# EAGLE board supervisor (EAGLE 5.11)
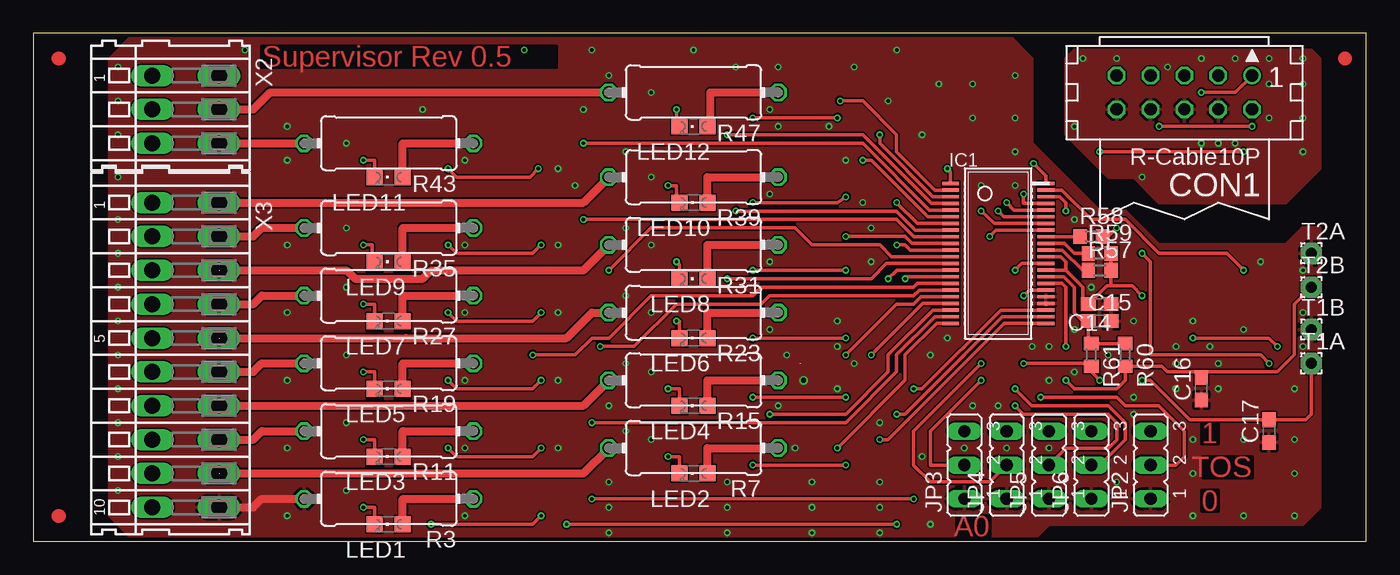
[diagram p0: board, top side]
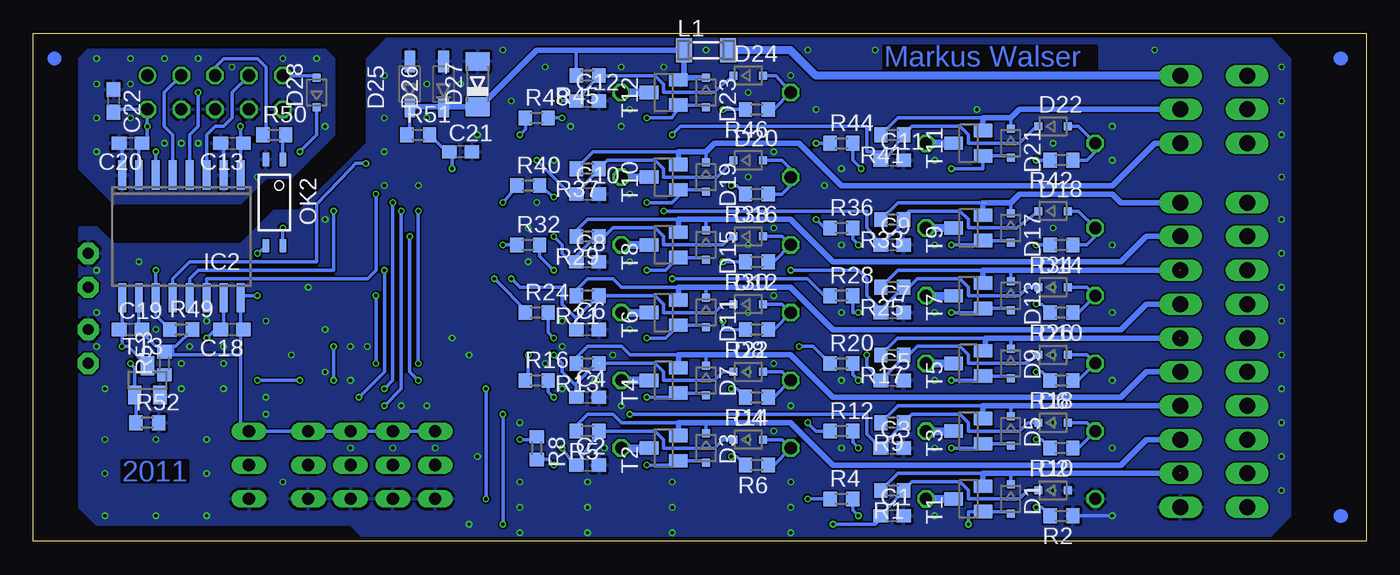
[diagram p1: board, bottom side, seen from below]

Size 100 x 38.09 mm. Coordinates in mm from the lower left corner, seen from the top.
Outline: 0,0 100,0 100,38.09 0,38.09 0,0
Copper layers (1*16): Top 0.035mm / dielectric 1.5mm / Bottom 0.035mm
Design rules "PCB-POOL HighSpec *": minimum track width 0.125mm, minimum drill 0.2mm, track to track 0.125mm, track to pad 0.125mm, pad to pad 0.125mm, via to via 0.125mm, smd to smd 0.125mm, copper to edge 0.3mm, drill to drill 0.2mm, minimum pad ring 0.2mm, minimum via ring 0.125mm, stop-mask expansion 0.075mm, vias tented up to drill 10mil, thermal gap 0.2mm

## Footprints (pad centres in the part's own frame; a part is rotated, then mirrored left to right if it is on the bottom)
C0603 = smd 1.1 x 1: 1 -0.85,0; 2 0.85,0
CON10 = drill 0.914 round: 1 -5.08,-1.27 | drill 0.914 octagon: 2 -5.08,1.27; 3 -2.54,-1.27; 4 -2.54,1.27; 5 0,-1.27; 6 0,1.27; 7 2.54,-1.27; 8 2.54,1.27; 9 5.08,-1.27; 10 5.08,1.27
SOD323-R = smd 0.6 x 0.6: A 1.1,0; C -1.1,0
SOD123 = smd 1.6 x 0.8: 1 -1.7,0; 2 1.7,0
MINIMELF = smd 1.4 x 1.8: A 1.7,0; C -1.7,0
SSOP44DL = smd 0.25 x 1.25: 1 -5.25,-3.575; 2 -4.75,-3.575; 3 -4.25,-3.575; 4 -3.75,-3.575; 5 -3.25,-3.575; 6 -2.75,-3.575; 7 -2.25,-3.575; 8 -1.75,-3.575; 9 -1.25,-3.575; 10 -0.75,-3.575; 11 -0.25,-3.575; 12 0.25,-3.575; 13 0.75,-3.575; 14 1.25,-3.575; 15 1.75,-3.575; 16 2.25,-3.575; 17 2.75,-3.575; 18 3.25,-3.575; 19 3.75,-3.575; 20 4.25,-3.575; 21 4.75,-3.575; 22 5.25,-3.575; 23 5.25,3.575; 24 4.75,3.575; 25 4.25,3.575; 26 3.75,3.575; 27 3.25,3.575; 28 2.75,3.575; 29 2.25,3.575; 30 1.75,3.575; 31 1.25,3.575; 32 0.75,3.575; 33 0.25,3.575; 34 -0.25,3.575; 35 -0.75,3.575; 36 -1.25,3.575; 37 -1.75,3.575; 38 -2.25,3.575; 39 -2.75,3.575; 40 -3.25,3.575; 41 -3.75,3.575; 42 -4.25,3.575; 43 -4.75,3.575; 44 -5.25,3.575
SO16W = smd 0.6 x 2.2: 1 -4.445,-4.6; 2 -3.175,-4.6; 3 -1.905,-4.6; 4 -0.635,-4.6; 5 0.635,-4.6; 6 1.905,-4.6; 7 3.175,-4.6; 8 4.445,-4.6; 9 4.445,4.6; 10 3.175,4.6; 11 1.905,4.6; 12 0.635,4.6; 13 -0.635,4.6; 14 -1.905,4.6; 15 -3.175,4.6; 16 -4.445,4.6
JP2 = drill 0.914 long: 1 -2.54,0; 2 0,0; 3 2.54,0
SM-1206 = smd 1.2 x 1.8: 1 -1.65,0; 2 1.65,0
CHIPLED_0805 = smd 1.2 x 1.2: A 0,-1.05; C 0,1.05
MINI-FLAT-4 = smd 1 x 0.5: 1 -3.24,0.635; 2 -3.24,-0.635; 3 3.24,-0.635; 4 3.24,0.635
R0603 = smd 1 x 1.1: 1 -0.85,0; 2 0.85,0
0411/12 = drill 0.914 octagon: 1 -6.35,0; 2 6.35,0
SOT23 = smd 1 x 1.4: 1 -0.95,-1.1; 2 0.95,-1.1; 3 0,1.1
1,6/0,8 = drill 0.813 pad 1.6 octagon: 1 0,0
233-503 = drill 1.2 long: A1 -2.54,2.5; A2 0,2.5; A3 2.54,2.5; B1 -2.54,-2.5; B2 0,-2.5; B3 2.54,-2.5
233-510 = drill 1.2 long: A1 -11.43,2.5; A2 -8.89,2.5; A3 -6.35,2.5; A4 -3.81,2.5; A5 -1.27,2.5; A6 1.27,2.5; A7 3.81,2.5; A8 6.35,2.5; A9 8.89,2.5; A10 11.43,2.5; B1 -11.43,-2.5; B2 -8.89,-2.5; B3 -6.35,-2.5; B4 -3.81,-2.5; B5 -1.27,-2.5; B6 1.27,-2.5; B7 3.81,-2.5; B8 6.35,-2.5; B9 8.89,-2.5; B10 11.43,-2.5

## Placement (x,y rotation side)
C1  100n  [C0603]  35.56,1.91 0 bottom
C2  100n  [C0603]  58.42,5.71 0 bottom
C3  100n  [C0603]  35.56,6.99 0 bottom
C4  100n  [C0603]  58.42,10.79 0 bottom
C5  100n  [C0603]  35.56,12.06 0 bottom
C6  100n  [C0603]  58.42,15.88 0 bottom
C7  100n  [C0603]  35.56,17.14 0 bottom
C8  100n  [C0603]  58.42,20.95 0 bottom
C9  100n  [C0603]  35.56,22.23 0 bottom
C10  100n  [C0603]  58.42,26.04 0 bottom
C11  100n  [C0603]  35.56,28.57 0 bottom
C12  100n  [C0603]  58.42,33.02 0 bottom
C13  100n  [C0603]  85.09,29.84 180 bottom
C14  1u  [C0603]  80.01,17.78 180 top
C15  1u  [C0603]  80.01,16.51 0 top
C16  1u  [C0603]  87.63,11.43 90 top
C17  1u  [C0603]  92.71,8.26 90 top
C18  100n  [C0603]  85.09,15.88 180 bottom
C19  100n  [C0603]  92.71,15.88 0 bottom
C20  100n  [C0603]  92.71,29.84 180 bottom
C21  100n  [C0603]  67.94,29.21 0 bottom
C22  1u  [C0603]  93.98,33.02 270 bottom
CON1  SPI  [CON10]  86.36,33.66 180 top
D1  MM3Z12VT1G  [SOD323-R]  26.67,3.17 270 bottom
D2  PDZ6.2B  [SOD323-R]  23.5,3.81 0 bottom
D3  MM3Z12VT1G  [SOD323-R]  49.53,6.99 270 bottom
D4  PDZ6.2B  [SOD323-R]  46.35,7.62 0 bottom
D5  MM3Z12VT1G  [SOD323-R]  26.67,8.26 270 bottom
D6  PDZ6.2B  [SOD323-R]  23.5,8.89 0 bottom
D7  MM3Z12VT1G  [SOD323-R]  49.53,12.06 270 bottom
D8  PDZ6.2B  [SOD323-R]  46.35,12.7 0 bottom
D9  MM3Z12VT1G  [SOD323-R]  26.67,13.34 270 bottom
D10  PDZ6.2B  [SOD323-R]  23.5,13.97 0 bottom
D11  MM3Z12VT1G  [SOD323-R]  49.53,17.14 270 bottom
D12  PDZ6.2B  [SOD323-R]  46.35,17.78 0 bottom
D13  MM3Z12VT1G  [SOD323-R]  26.67,18.41 270 bottom
D14  PDZ6.2B  [SOD323-R]  23.5,19.05 0 bottom
D15  MM3Z12VT1G  [SOD323-R]  49.53,22.23 270 bottom
D16  PDZ6.2B  [SOD323-R]  46.35,22.86 0 bottom
D17  MM3Z12VT1G  [SOD323-R]  26.67,23.5 270 bottom
D18  PDZ6.2B  [SOD323-R]  23.5,24.77 0 bottom
D19  MM3Z12VT1G  [SOD323-R]  49.53,27.3 270 bottom
D20  PDZ6.2B  [SOD323-R]  46.35,28.57 0 bottom
D21  MM3Z12VT1G  [SOD323-R]  26.67,29.84 270 bottom
D22  PDZ6.2B  [SOD323-R]  23.5,31.11 0 bottom
D23  MM3Z12VT1G  [SOD323-R]  49.53,33.66 270 bottom
D24  PDZ6.2B  [SOD323-R]  46.35,34.92 0 bottom
D25  BAT46W  [SOD123]  71.75,34.29 90 bottom
D26  BAT46W  [SOD123]  69.22,34.29 90 bottom
D27  BZV55-C62  [MINIMELF]  66.67,34.29 90 bottom
D28  CMDSH2-3  [SOD323-R]  78.74,33.66 90 bottom
IC1  LTC6802-2  [SSOP44DL]  72.39,21.59 270 top
IC2  ADuM1401  [SO16W]  88.9,22.86 180 bottom
JP2  TOS  [JP2]  83.82,5.71 90 top
JP3  A0  [JP2]  69.85,5.71 90 top
JP4  A1  [JP2]  73.03,5.71 90 top
JP5  A2  [JP2]  76.2,5.71 90 top
JP6  A3  [JP2]  79.38,5.71 90 top
L1  BLM31PG121SN1L  [SM-1206]  49.53,36.83 0 bottom
LED1  RED  [CHIPLED_0805]  26.67,1.27 90 top
LED2  RED  [CHIPLED_0805]  49.53,5.08 90 top
LED3  RED  [CHIPLED_0805]  26.67,6.35 90 top
LED4  RED  [CHIPLED_0805]  49.53,10.16 90 top
LED5  RED  [CHIPLED_0805]  26.67,11.43 90 top
LED6  RED  [CHIPLED_0805]  49.53,15.24 90 top
LED7  RED  [CHIPLED_0805]  26.67,16.51 90 top
LED8  RED  [CHIPLED_0805]  49.53,19.68 90 top
LED9  RED  [CHIPLED_0805]  26.67,20.95 90 top
LED10  RED  [CHIPLED_0805]  49.53,25.4 90 top
LED11  RED  [CHIPLED_0805]  26.67,27.3 90 top
LED12  RED  [CHIPLED_0805]  49.53,31.11 90 top
OK2  TLP281  [MINI-FLAT-4]  81.92,25.4 270 bottom
R1  100  [R0603]  35.56,3.81 180 bottom
R2  470  [R0603]  22.86,1.91 180 bottom
R3  15  [0411/12]  26.67,3.17 180 top
R4  3k3  [R0603]  39.37,3.17 0 bottom
R5  100  [R0603]  58.42,8.26 180 bottom
R6  470  [R0603]  45.72,5.71 180 bottom
R7  15  [0411/12]  49.53,6.99 180 top
R8  3k3  [R0603]  62.23,6.99 270 bottom
R9  100  [R0603]  35.56,8.89 180 bottom
R10  470  [R0603]  22.86,6.99 180 bottom
R11  15  [0411/12]  26.67,8.26 180 top
R12  3k3  [R0603]  39.37,8.26 0 bottom
R13  100  [R0603]  58.42,13.34 180 bottom
R14  470  [R0603]  45.72,10.79 180 bottom
R15  15  [0411/12]  49.53,12.06 180 top
R16  3k3  [R0603]  62.23,12.06 0 bottom
R17  100  [R0603]  35.56,13.97 180 bottom
R18  470  [R0603]  22.86,12.06 180 bottom
R19  15  [0411/12]  26.67,13.34 180 top
R20  3k3  [R0603]  39.37,13.34 0 bottom
R21  100  [R0603]  58.42,18.41 180 bottom
R22  470  [R0603]  45.72,15.88 180 bottom
R23  15  [0411/12]  49.53,17.14 180 top
R24  3k3  [R0603]  62.23,17.14 0 bottom
R25  100  [R0603]  35.56,19.05 180 bottom
R26  470  [R0603]  22.86,17.14 180 bottom
R27  15  [0411/12]  26.67,18.41 180 top
R28  3k3  [R0603]  39.37,18.41 0 bottom
R29  100  [R0603]  58.42,22.86 180 bottom
R30  470  [R0603]  45.72,20.95 180 bottom
R31  15  [0411/12]  49.53,22.23 180 top
R32  3k3  [R0603]  62.87,22.23 0 bottom
R33  100  [R0603]  35.56,24.13 180 bottom
R34  470  [R0603]  22.86,22.23 180 bottom
R35  15  [0411/12]  26.67,23.5 180 top
R36  3k3  [R0603]  39.37,23.5 0 bottom
R37  100  [R0603]  58.42,27.94 180 bottom
R38  470  [R0603]  45.72,26.04 180 bottom
R39  15  [0411/12]  49.53,27.3 180 top
R40  3k3  [R0603]  62.87,26.67 0 bottom
R41  100  [R0603]  35.56,30.48 180 bottom
R42  470  [R0603]  22.86,28.57 180 bottom
R43  15  [0411/12]  26.67,29.84 180 top
R44  3k3  [R0603]  39.37,29.84 0 bottom
R45  100  [R0603]  58.42,34.92 180 bottom
R46  470  [R0603]  45.72,32.38 180 bottom
R47  15  [0411/12]  49.53,33.66 180 top
R48  3k3  [R0603]  62.23,31.75 0 bottom
R49  3k9  [R0603]  88.9,15.88 0 bottom
R50  3k9  [R0603]  81.92,30.48 0 bottom
R51  20  [R0603]  71.12,30.48 0 bottom
R52  100k  [R0603]  91.44,8.89 0 bottom
R53  100k  [R0603]  90.17,13.34 90 bottom
R57  1M  [R0603]  80.01,20.32 0 top
R58  1M  [R0603]  79.38,22.86 0 top
R59  1M  [R0603]  80.01,21.59 0 top
R60  100k  [R0603]  81.92,13.97 270 top
R61  100k  [R0603]  79.38,13.97 270 top
T1  BSS308PE  [SOT23]  29.84,3.17 90 bottom
T1A  WIREPAD1,6/0,8  [1,6/0,8]  95.89,13.34 0 top
T1B  WIREPAD1,6/0,8  [1,6/0,8]  95.89,15.88 0 top
T2  BSS308PE  [SOT23]  52.7,6.99 90 bottom
T2A  WIREPAD1,6/0,8  [1,6/0,8]  95.89,21.59 0 top
T2B  WIREPAD1,6/0,8  [1,6/0,8]  95.89,19.05 0 top
T3  BSS308PE  [SOT23]  29.84,8.26 90 bottom
T4  BSS308PE  [SOT23]  52.7,12.06 90 bottom
T5  BSS308PE  [SOT23]  29.84,13.34 90 bottom
T6  BSS308PE  [SOT23]  52.7,17.14 90 bottom
T7  BSS308PE  [SOT23]  29.84,18.41 90 bottom
T8  BSS308PE  [SOT23]  52.7,22.23 90 bottom
T9  BSS308PE  [SOT23]  29.84,23.5 90 bottom
T10  BSS308PE  [SOT23]  52.7,27.3 90 bottom
T11  BSS308PE  [SOT23]  29.84,29.84 90 bottom
T12  BSS308PE  [SOT23]  52.7,33.66 90 bottom
T13  PMV30UN  [SOT23]  91.44,12.06 0 bottom
X2  11..12  [233-503]  11.43,32.38 270 top
X3  1..10  [233-510]  11.43,13.97 270 top

## Library data of the parts
C1-C22 R1-R53 R57-R61 = resistor
CON1 = con-harting; OC_FARNELL: unknown; OC_NEWARK: unknown
D1-D24 T1-T12 = icontroller
D25 D26 = semicon-smd-ipc
D27 D28 = diode
IC1 T13 = ltc6802
IC2 = spisolator
JP2-JP6 = jumper
L1 = inductor-neosid
LED1-LED12 = led
OK2 = optocoupler; OC_FARNELL: unknown; OC_NEWARK: unknown
T1A T1B T2A T2B = wirepad
X2 X3 = con-wago

## Nets
+5V: C13.1 C20.1 C22.2 CON1.2 IC2.1 IC2.7
GND: C1.2 C2.2 C3.2 C4.2 C5.2 C6.2 C7.2 C8.2 C9.2 C10.2 C11.2 C12.2 C14.1 C15.2 C16.1 C17.1 C21.2 D2.A D25.2 D26.2 D27.A IC1.26 IC1.27 JP2.1 JP3.1 JP4.1 JP5.1 JP6.1 R2.1 R3.2 R52.2 T1B.1 T2A.1 T13.2 X3.A10
GNDIO: C13.2 C20.2 C22.1 CON1.4 CON1.6 CON1.8 CON1.10 IC2.2 IC2.8 OK2.2
N$1: LED1.C R2.2
N$2: D1.A R4.2 T1.1
N$3: LED1.A R3.1 T1.3
N$4: C1.1 D2.C IC1.24 R1.1
N$5: D1.C D4.A R1.2 R6.1 R7.2 T1.2 X3.A9
N$6: C2.1 D4.C IC1.22 R5.1
N$7: C17.2 IC1.28 R61.2 T1A.1
N$8: IC1.23 R8.1
N$9: C5.1 D10.C IC1.16 R17.1
N$10: D3.A R8.2 T2.1
N$11: LED2.A R7.1 T2.3
N$12: LED2.C R6.2
N$13: D3.C D6.A R5.2 R10.1 R11.2 T2.2 X3.A8
N$14: C3.1 D6.C IC1.20 R9.1
N$15: IC1.21 R12.1
N$16: IC1.17 R20.1
N$17: D5.A R12.2 T3.1
N$18: LED3.A R11.1 T3.3
N$19: LED3.C R10.2
N$20: D5.C D8.A R9.2 R14.1 R15.2 T3.2 X3.A7
N$21: IC1.34 R57.1
N$22: IC1.19 R16.1
N$23: D9.A R20.2 T5.1
N$24: D7.A R16.2 T4.1
N$25: LED4.A R15.1 T4.3
N$26: LED4.C R14.2
N$27: D7.C D10.A R13.2 R18.1 R19.2 T4.2 X3.A6
N$28: C4.1 D8.C IC1.18 R13.1
N$29: LED5.A R19.1 T5.3
N$30: LED5.C R18.2
N$31: D9.C D12.A R17.2 R22.1 R23.2 T5.2 X3.A5
N$32: C15.1 IC1.30 R60.1 R61.1
N$33: C6.1 D12.C IC1.14 R21.1
N$34: IC1.15 R24.1
N$35: D11.A R24.2 T6.1
N$36: LED6.A R23.1 T6.3
N$37: LED6.C R22.2
N$38: D11.C D14.A R21.2 R26.1 R27.2 T6.2 X3.A4
N$39: C16.2 IC1.29 R60.2 T2B.1
N$40: C7.1 D14.C IC1.12 R25.1
N$41: IC1.13 R28.1
N$42: D13.A R28.2 T7.1
N$43: LED7.A R27.1 T7.3
N$44: LED7.C R26.2
N$45: D13.C D16.A R25.2 R30.1 R31.2 T7.2 X3.A3
N$46: IC1.37 JP3.2
N$47: C8.1 D16.C IC1.10 R29.1
N$48: IC1.11 R32.1
N$49: D15.A R32.2 T8.1
N$50: LED8.A R31.1 T8.3
N$51: LED8.C R30.2
N$52: D15.C D18.A R29.2 R34.1 R35.2 T8.2 X3.A2
N$53: IC1.38 JP4.2
N$54: C9.1 D18.C IC1.8 R33.1
N$55: IC1.9 R36.1
N$56: D17.A R36.2 T9.1
N$57: LED9.A R35.1 T9.3
N$58: LED9.C R34.2
N$59: D17.C D20.A R33.2 R38.1 R39.2 T9.2 X3.A1
N$60: IC1.39 JP5.2
N$61: C10.1 D20.C IC1.6 R37.1
N$62: IC1.7 R40.1
N$63: D19.A R40.2 T10.1
N$64: LED10.A R39.1 T10.3
N$65: LED10.C R38.2
N$66: D19.C D22.A R37.2 R42.1 R43.2 T10.2 X2.A3
N$67: IC1.40 JP6.2
N$68: C11.1 D22.C IC1.4 R41.1
N$69: IC1.5 R44.1
N$70: D21.A R44.2 T11.1
N$71: LED11.A R43.1 T11.3
N$72: LED11.C R42.2
N$74: IC1.43 IC2.11 R49.1
N$75: C12.1 D24.C IC1.2 R45.1
N$76: IC1.3 R48.1
N$77: D23.A R48.2 T12.1
N$78: LED12.A R47.1 T12.3
N$79: LED12.C R46.2
N$80: L1.2 X2.A1
N$81: IC1.44 IC2.12
N$82: IC1.42 IC2.13
N$83: IC1.41 IC2.14
N$84: D21.C D24.A R41.2 R46.1 R47.2 T11.2 X2.A2
N$85: IC1.32 JP2.2
N$86: C18.2 C19.1 IC2.9 IC2.15 R53.1 T13.3
N$87: IC1.35 R59.1
N$88: IC1.36 R58.1
N$89: OK2.3 R52.1 T13.1
N$90: D28.C IC2.6
N$92: CON1.7 IC2.3
N$93: CON1.3 IC2.5
N$94: CON1.1 IC2.4
N$95: CON1.9 D28.A
N$96: OK2.1 R50.2
N$97: CON1.5 R50.1
N$98: C21.1 IC1.1 R51.2
N$100: D23.C D25.1 D26.1 D27.C L1.1 R45.2 R51.1 T12.2
N$103: IC1.25 R4.1
VCC: C14.2 C18.1 C19.2 IC1.31 IC1.33 IC2.10 IC2.16 JP2.3 JP3.3 JP4.3 JP5.3 JP6.3 OK2.4 R49.2 R53.2 R57.2 R58.2 R59.2

## Tracks (layer width: path | path; a pad name or v marks a point on that pad's centre or on a via)
+5V  (via drill 0.25)
  Top 0.254: v84.45,31.11 v91.44,31.11
  Bottom 0.254: IC2.1 84.45,29.84 | 84.45,29.84 C13.1 | IC2.7 92.08,29.84 C20.1 91.44,30.27 v91.44,31.11 CON1.2 93.77,32.38 C22.2 | 84.45,29.84 v84.45,31.11
GND  (via drill 0.25 pad 0.25, 0.38 pad 0.25)
  Top 0.61: R3.2 17.14,3.17 16.51,2.54 X3.A10
  Bottom 0.254: 21.59,1.91 R2.1 v19.05,1.91
  other vias: 19.05,6.99 19.05,12.06 19.05,17.14 19.05,22.23 19.05,28.57 15.88,36.83 32.38,28.57 39.37,17.14 39.37,22.23 39.37,12.06 39.37,6.99 32.38,1.91 43.18,4.45 73.03,6.99 63.5,8.89 57.15,6.99 57.78,12.06 55.24,15.88 62.87,23.5 55.24,20.95 62.87,20.95 32.38,12.06 32.38,6.99 39.37,27.94 32.38,22.23 32.38,17.14 55.24,26.04 55.24,32.38 41.27,32.38 87,1.91 94.61,11.43 88.27,14.61 78.11,24.13 71.12,26.67 6.35,35.56 6.35,33.02 6.35,30.48 6.35,27.3 6.35,24.13 6.35,21.59 6.35,19.05 6.35,16.51 6.35,13.97 6.35,11.43 6.35,8.89 6.35,6.35 6.35,3.81 19.05,31.11 63.5,4.45 79.38,19.05 43.18,2.54 85.72,11.43 52.07,2.54 73.66,26.67 73.66,31.75 90.81,1.91 92.08,20.95 94.61,1.91 73.66,34.92 40.64,26.67 55.88,35.56 43.18,10.16 23.5,13.97 23.5,8.89 23.5,19.05 23.5,23.5 23.5,29.84 46.35,33.66 46.35,27.3 46.35,22.23 46.35,12.7 46.35,7.62 46.35,17.14 62.23,25.4 66.67,6.35 52.07,4.45 58.42,4.45 58.42,2.54 67.31,13.97 82.55,16.51 76.2,6.99 55.88,10.16 95.25,20.32 56.52,13.97 23.5,3.81 29.21,32.38 41.91,36.83 67.31,1.27 68.58,15.24 74.93,14.61 81.28,4.45 94.61,5.08 36.83,36.83 88.9,13.34 85.72,13.34 64.77,36.83 67.94,34.29 61.59,35.56 63.5,2.54 90.81,15.88 85.72,14.61 88.9,11.43 87,5.08 94.61,7.62 72.39,10.16 61.59,13.34 60.33,16.51 60.33,14.61 60.33,11.43 43.18,34.92 90.81,7.62 87,7.62 82.55,9.53 80.64,13.97 76.2,12.06 70.48,10.16 69.85,6.99 95.25,14.61 95.25,17.14 70.48,34.29 52.7,35.56 49.53,36.83 87,16.51 66.67,30.48 44.45,18.41 44.45,23.5 44.45,29.21 44.45,13.34 44.45,8.26 52.07,0.64 58.42,0.64 43.18,0.64 73.66,29.21 64.14,33.02 63.5,0.64 70.48,31.75 60.96,28.57 55.88,31.11 59.69,31.11 76.2,14.61 82.55,10.79 78.11,15.88 78.11,12.7
  pour Bottom: 7.62,38.1 73.03,38.1 74.93,36.2 74.93,29.84 80.01,24.77 81.92,24.77 84.45,22.23 93.98,22.23 95.25,23.5 96.52,23.5 96.52,2.54 95.25,1.27 76.2,1.27 74.93,0 7.62,0 5.71,1.91 5.71,36.2
  pour Top: 7.62,38.1 73.03,38.1 74.93,36.2 74.93,29.84 80.01,24.77 81.92,24.77 84.45,22.23 93.98,22.23 95.25,23.5 96.52,23.5 96.52,2.54 95.25,1.27 76.2,1.27 74.93,0 7.62,0 5.71,1.91 5.71,36.2
GNDIO  (via drill 0.25)
  Bottom 0.254: IC2.8 93.34,29.84 C20.2 | IC2.2 85.72,29.84 C13.2
  other vias: 78.11,31.11 87.63,36.2 90.17,36.2 92.71,36.2 95.25,36.2 95.25,34.29 95.25,31.75 92.71,34.29 81.28,36.2 83.19,27.3 95.25,29.21 92.71,31.75 85.09,35.56 78.74,36.2 87.63,29.84 88.9,29.84 90.17,29.84
  pour Bottom: 77.47,36.2 78.11,36.83 95.89,36.83 96.52,36.2 96.52,27.94 93.98,25.4 84.45,25.4 82.55,27.3 80.64,27.3 77.47,30.48
  pour Top: 77.47,36.2 78.11,36.83 95.89,36.83 96.52,36.2 96.52,27.94 93.98,25.4 84.45,25.4 82.55,27.3 80.64,27.3 77.47,30.48
N$1  (via drill 0.25 pad 0.25)
  Top 0.254: v24.77,2.54 25.62,2.54 LED1.C
  Bottom 0.254: R2.2 24.34,2.54 v24.77,2.54
N$2  (via drill 0.25 pad 0.25)
  Top 0.254: v29.84,1.27 37.47,1.27 v38.1,1.91
  Bottom 0.254: D1.A 26.54,2.23 T1.1 29.84,2.23 v29.84,1.27 | v38.1,1.91 38.52,2.33 R4.2
N$3
  Top 0.61: LED1.A 27.72,3.17 R3.1
  Bottom 0.61: R3.1 T1.3
N$4  (via drill 0.25)
  Top 0.254: v40.01,1.27 v64.77,1.27 | IC1.24 72.72,16.84 65.41,9.53 v64.77,9.53
  Bottom 0.254: 34.8,3.7 R1.1 | 34.8,3.7 C1.1 36.41,1.69 36.83,1.27 v40.01,1.27 | D2.C 25.4,3.81 26.04,3.17 29.84,3.17 29.84,3.81 30.48,4.45 34.06,4.45 34.8,3.7 | v64.77,1.27 v64.77,9.53
N$5  (1 unrouted)
  Top 0.61: R7.2 41.27,5.08 X3.A9
  Bottom 0.254: D4.A 43.81,7.62 R7.2 44.45,5.71 R6.1 | R1.2 35.14,5.08 28.57,5.08 | 26.67,5.08 D1.C
  Bottom 0.406: 13.97,5.08 26.67,5.08 28.57,5.08 28.75,5.08 T1.2
N$6  (via drill 0.25)
  Top 0.254: v60.33,6.99 65.41,12.06 65.41,13.97 67.78,16.34 IC1.22
  Bottom 0.254: D4.C 48.26,7.62 48.9,6.99 52.7,6.99 52.7,7.62 53.34,8.26 R5.1 C2.1 59.27,5.5 v60.33,6.99
N$7  (via drill 0.25)
  Top 0.254: IC1.28 74.72,18.84 v74.3,18.41 | C17.2 87.63,9.11 | C17.2 95.47,9.11 95.89,9.53 T1A.1 | v74.3,13.34 79.16,13.34 R61.2 79.38,12.7 v80.01,12.06 | C17.2 87.21,9.11 | v83.19,12.06 83.82,12.06 86.78,9.11 C17.2
  Bottom 0.254: v74.3,13.34 v74.3,18.41 | v80.01,12.06 v83.19,12.06
N$8  (via drill 0.25)
  Top 0.254: IC1.23 72.86,16.34 64.14,7.62 v63.5,7.62
  Bottom 0.254: v63.5,7.62 62.23,7.62 R8.1
N$9  (via drill 0.25 pad 0.25)
  Top 0.254: v37.47,13.97 40.64,13.97 41.91,15.24 43.18,15.24 46.35,18.41 53.98,18.41 54.61,19.05 66.04,19.05 66.33,19.34 IC1.16
  Bottom 0.254: D10.C 25.58,13.34 29.84,13.34 29.84,13.97 30.48,14.61 33.66,14.61 34.29,13.97 R17.1 34.71,13.77 C5.1 37.47,13.12 v37.47,13.97
N$10  (via drill 0.25 pad 0.25)
  Top 0.254: v53.98,5.71 v60.96,5.71
  Bottom 0.254: D3.A 49.4,6.04 T2.1 51.92,5.71 v53.98,5.71 | v60.96,5.71 61.38,6.13 R8.2
N$11
  Top 0.61: LED2.A 50.58,6.99 R7.1
  Bottom 0.61: R7.1 T2.3
N$12  (via drill 0.25 pad 0.25)
  Top 0.254: v47.62,6.35 48.48,6.35 LED2.C
  Bottom 0.254: v47.62,6.35 47.2,6.35 R6.2
N$13
  Top 0.61: R11.2 17.14,8.26 16.51,7.62 X3.A8
  Bottom 0.254: D6.A 20.95,8.89 R11.2 21.59,6.99 R10.1 | R5.2 59.27,8.68 58.42,9.53 56.52,9.53 55.88,8.89 49.53,8.89 D3.C
  Bottom 0.406: X3.A8 16.51,7.62 18.41,5.71 25.4,5.71 27.94,5.71 40.01,5.71 43.18,8.89 49.53,8.89 51.6,8.89 T2.2
N$14  (via drill 0.25)
  Top 0.254: v55.24,9.53 60.96,9.53 64.14,12.7 64.14,13.97 67.5,17.34 IC1.20
  Bottom 0.254: D6.C 25.4,8.89 26.04,8.26 29.84,8.26 29.84,8.89 30.48,9.53 34.08,9.53 R9.1 C3.1 37.47,8.04 37.47,9.53 v55.24,9.53
N$15  (via drill 0.25)
  Top 0.254: v41.91,8.89 60.96,8.89 64.77,12.7 64.77,13.97 67.64,16.84 IC1.21
  Bottom 0.254: R12.1 41.27,8.26 v41.91,8.89
N$16  (via drill 0.25 pad 0.25)
  Top 0.254: v42.55,14.61 45.09,14.61 48.26,17.78 54.61,17.78 55.24,18.41 66.04,18.41 66.47,18.84 IC1.17
  Bottom 0.254: v42.55,14.61 41.49,14.61 R20.1
N$17  (via drill 0.25 pad 0.25)
  Top 0.254: v31.11,6.99 31.75,6.35 37.47,6.35 v38.1,6.99
  Bottom 0.254: D5.A 26.54,7.3 T3.1 29.07,6.99 v31.11,6.99 | v38.1,6.99 38.52,7.41 R12.2
N$18
  Top 0.61: LED3.A 27.72,8.26 R11.1
  Bottom 0.61: R11.1 T3.3
N$19  (via drill 0.25 pad 0.25)
  Top 0.254: LED3.C 25.62,7.62 v24.77,7.62
  Bottom 0.254: v24.77,7.62 24.34,7.62 R10.2
N$20
  Top 0.61: R15.2 41.27,10.16 X3.A7
  Bottom 0.254: D8.A 43.81,12.7 R15.2 44.45,10.79 R14.1 | R9.2 35.14,10.16 28.57,10.16 | 26.67,10.16 D5.C
  Bottom 0.406: X3.A7 26.67,10.16 28.57,10.16 28.75,10.16 T3.2
N$21
  Top 0.254: IC1.34 77.22,21.84 78.74,20.32 R57.1
N$22  (via drill 0.25 pad 0.25)
  Top 0.254: IC1.19 66.73,17.84 v62.87,13.97
  Bottom 0.254: v62.87,13.97 62.87,12.06 R16.1
N$23  (via drill 0.25 pad 0.25)
  Top 0.254: v31.11,12.06 31.75,11.43 37.47,11.43 v38.1,12.06
  Bottom 0.254: D9.A 26.54,12.38 T5.1 29.07,12.06 v31.11,12.06 | v38.1,12.06 38.52,12.48 R20.2
N$24  (via drill 0.25 pad 0.25)
  Top 0.254: v53.98,10.79 v60.96,10.79
  Bottom 0.254: D7.A 49.4,11.12 T4.1 51.92,10.79 v53.98,10.79 | v60.96,10.79 61.38,11.21 R16.2
N$25
  Top 0.61: LED4.A 50.58,12.06 R15.1
  Bottom 0.61: R15.1 T4.3
N$26  (via drill 0.25 pad 0.25)
  Top 0.254: v47.62,11.43 48.48,11.43 LED4.C
  Bottom 0.254: v47.62,11.43 47.2,11.43 R14.2
N$27
  Top 0.61: R19.2 17.14,13.34 16.51,12.7 X3.A6
  Bottom 0.254: D10.A 20.95,13.97 R19.2 21.59,12.06 R18.1 | R13.2 59.27,13.76 58.42,14.61 55.88,14.61 55.24,13.97 49.53,13.97 D7.C
  Bottom 0.406: X3.A6 16.51,12.7 18.41,10.79 40.01,10.79 43.18,13.97 49.53,13.97 51.6,13.97 T4.2
N$28  (via drill 0.25 pad 0.25)  (1 unrouted)
  Top 0.254: v60.96,13.97 64.77,17.78 66.04,17.78 66.6,18.34 IC1.18
  Bottom 0.254: D8.C 48.26,12.7 48.9,12.06 52.7,12.06 52.7,12.7 53.34,13.34 57.54,13.34 | C4.1 59.27,11.64 59.37,11.75 | 59.37,11.75 60.33,12.7 60.33,13.34 v60.96,13.97 | R13.1 57.78,13.34 59.37,11.75
N$29
  Top 0.61: LED5.A 27.72,13.34 R19.1
  Bottom 0.61: R19.1 T5.3
N$30  (via drill 0.25 pad 0.25)
  Top 0.254: v24.77,12.7 25.62,12.7 LED5.C
  Bottom 0.254: v24.77,12.7 24.34,12.7 R18.2
N$31  (1 unrouted)
  Top 0.406: 27.94,15.24 27.92,15.22
  Top 0.61: R23.2 41.91,17.14 40.01,15.24 27.94,15.24 X3.A5
  Bottom 0.254: D12.A 43.81,17.78 R23.2 44.45,15.88 R22.1 | R17.2 35.16,15.22 26.67,15.22 | 26.67,15.22 26.21,15.22 26.21,15.24 | 26.67,15.22 D9.C
  Bottom 0.406: 13.97,15.24 26.04,15.24 | 26.04,15.24 26.21,15.24 | T5.2 28.57,14.29 28.57,15.24 26.04,15.24
N$32
  Top 0.254: R60.1 R61.1 79.16,15.24 C15.1 78.74,16.51 78.11,17.14 78.11,19.05 77.31,19.84 IC1.30
N$33  (via drill 0.25 pad 0.25)
  Top 0.254: IC1.14 64.79,20.34 v64.14,19.68
  Bottom 0.254: D12.C 48.26,17.78 48.9,17.14 52.7,17.14 52.7,17.78 53.34,18.41 R21.1 59.27,16.71 | 59.27,16.71 C6.1 | v64.14,19.68 63.5,19.05 60.33,19.05 60.33,17.77 59.27,16.71
N$34  (via drill 0.25 pad 0.25)
  Top 0.254: IC1.15 65.56,19.84 v65.41,19.68
  Bottom 0.254: R24.1 62.87,17.14 v65.41,19.68
N$35  (via drill 0.25 pad 0.25)
  Top 0.254: v53.98,15.24 v60.96,15.24
  Bottom 0.254: D11.A 49.4,16.2 T6.1 52.56,15.24 v53.98,15.24 | v60.96,15.24 61.38,15.66 R24.2
N$36
  Top 0.61: LED6.A 50.58,17.14 R23.1
  Bottom 0.61: R23.1 T6.3
N$37  (via drill 0.25 pad 0.25)
  Top 0.254: LED6.C 48.48,16.51 v48.26,16.51
  Bottom 0.254: v48.26,16.51 48.26,15.88 R22.2
N$38
  Top 0.61: R27.2 17.14,18.41 16.51,17.78 X3.A4
  Bottom 0.254: D14.A 20.95,19.05 R27.2 22.01,16.73 R26.1 | R21.2 59.27,18.84 58.42,19.68 56.52,19.68 55.88,19.05 49.53,19.05 D11.C
  Bottom 0.406: X3.A4 16.51,17.78 18.41,15.88 40.01,15.88 43.18,19.05 49.53,19.05 51.6,19.05 T6.2
N$39  (via drill 0.25)
  Top 0.254: T2B.1 94.61,17.78 94.61,13.97 93.34,12.7 87.63,12.7 | v77.47,12.06 78.11,11.43 81.28,11.43 81.92,12.06 R60.2 84.67,13.12 85.09,12.7 87.63,12.7 | IC1.29 77.18,19.34 77.47,19.05 v77.47,14.61 | 87.63,12.7 C16.2
  Bottom 0.254: v77.47,12.06 v77.47,14.61
N$40  (via drill 0.25 pad 0.25)
  Top 0.254: v43.18,20.32 46.35,23.5 57.15,23.5 58.42,22.23 63.5,22.23 64.39,21.34 IC1.12
  Bottom 0.254: 36.41,17.35 C7.1 | 36.41,17.35 R25.1 34.29,19.05 33.66,19.68 30.48,19.68 29.84,19.05 29.84,18.41 26.04,18.41 25.4,19.05 D14.C | 36.41,17.35 37.47,18.41 37.47,19.68 38.1,20.32 v43.18,20.32
N$41  (via drill 0.25 pad 0.25)
  Top 0.254: v52.07,19.68 62.87,19.68 64.02,20.84 IC1.13
  Bottom 0.254: v52.07,19.68 41.91,19.68 40.64,18.41 R28.1
N$42  (via drill 0.25 pad 0.25)
  Top 0.254: v31.11,17.14 31.75,16.51 37.47,16.51 v38.1,17.14
  Bottom 0.254: D13.A 26.67,17.46 T7.1 28.75,17.14 v31.11,17.14 | v38.1,17.14 38.52,17.14 R28.2
N$43
  Top 0.61: LED7.A 27.72,18.41 R27.1
  Bottom 0.61: R27.1 T7.3
N$44  (via drill 0.25 pad 0.25)
  Top 0.254: v24.77,17.78 25.62,17.78 LED7.C
  Bottom 0.254: v24.77,17.78 24.34,17.78 R26.2
N$45  (1 unrouted)
  Top 0.61: R31.2 41.27,20.32 29.84,20.32 29.21,19.68 24.13,19.68 23.5,20.32 X3.A3
  Bottom 0.254: D16.A 43.81,22.86 R31.2 44.45,20.95 R30.1 | R25.2 35.14,20.32 26.67,20.32 D13.C
  Bottom 0.406: 13.97,20.32 26.67,20.32 28.75,20.32 T7.2
N$46  (via drill 0.25)
  Top 0.254: JP3.2 67.31,5.71 67.31,8.26 v71.12,12.06 | v71.75,22.86 72.23,23.34 IC1.37
  Bottom 0.254: v71.12,12.06 71.75,12.7 v71.75,22.86
N$47  (via drill 0.25 pad 0.25)
  Top 0.254: v60.96,22.86 65.41,22.86 65.92,22.34 IC1.10
  Bottom 0.254: D16.C 47.8,22.68 48.26,22.23 52.7,22.23 52.7,22.86 53.34,23.5 56.52,23.5 57.15,22.86 R29.1 57.78,22.86 59.27,21.38 C8.1 59.69,20.95 60.33,21.59 60.33,22.23 v60.96,22.86
N$48  (via drill 0.25 pad 0.25)
  Top 0.254: v64.77,22.23 65.41,22.23 65.79,21.84 IC1.11
  Bottom 0.254: R32.1 v64.77,22.23
N$49  (via drill 0.25 pad 0.25)
  Top 0.254: v53.98,20.32 v60.96,20.32
  Bottom 0.254: D15.A 49.4,21.27 T8.1 52.56,20.32 v53.98,20.32 | v60.96,20.32 62.02,21.38 R32.2
N$50
  Top 0.61: LED8.A 50.58,22.23 R31.1
  Bottom 0.61: R31.1 T8.3
N$51  (via drill 0.25 pad 0.25)
  Top 0.254: LED8.C 48.48,20.73 v48.26,20.95
  Bottom 0.254: v48.26,20.95 R30.2
N$52
  Top 0.61: R35.2 17.14,23.5 16.51,22.86 X3.A2
  Bottom 0.254: D18.A 21.59,24.77 R35.2 20.32,22.86 20.95,22.23 R34.1 | R29.2 59.27,23.28 58.42,24.13 49.53,24.13 D15.C
  Bottom 0.406: X3.A2 16.51,22.86 18.41,20.95 40.01,20.95 43.18,24.13 49.53,24.13 51.6,24.13 T8.2
N$53  (via drill 0.25)
  Top 0.254: JP4.2 71.75,4.45 67.31,4.45 66.04,5.71 66.04,8.26 v71.12,13.34 | v71.12,24.77 72.1,23.84 IC1.38
  Bottom 0.254: v71.12,13.34 v71.12,24.77
N$54  (via drill 0.25 pad 0.25)
  Top 0.254: v52.7,24.77 64.77,24.77 66.19,23.34 IC1.8
  Bottom 0.254: D18.C 26.21,23.5 29.84,23.5 29.84,24.13 30.48,24.77 34.29,24.77 34.92,24.13 | 34.92,24.13 R33.1 | 34.92,24.13 34.92,23.71 C9.1 37.47,23.5 37.47,24.77 v52.7,24.77
N$55  (via drill 0.25 pad 0.25)
  Top 0.254: v41.27,24.13 64.77,24.13 66.06,22.84 IC1.9
  Bottom 0.254: v41.27,24.13 40.64,23.5 R36.1
N$56  (via drill 0.25 pad 0.25)
  Top 0.254: v31.11,22.23 31.75,21.59 37.47,21.59 v38.1,22.23
  Bottom 0.254: D17.A 26.54,22.55 T9.1 28.57,22.38 28.57,22.23 v31.11,22.23 | R36.2 38.52,22.64 v38.1,22.23
N$57
  Top 0.61: LED9.A 27.72,23.5 R35.1
  Bottom 0.61: R35.1 T9.3
N$58  (via drill 0.25 pad 0.25)
  Top 0.254: v24.77,22.23 25.4,22.23 25.4,21.18 LED9.C
  Bottom 0.254: R34.2 v24.77,22.23
N$59  (1 unrouted)
  Top 0.61: R39.2 41.27,25.4 X3.A1
  Bottom 0.254: R38.1 43.81,26.04 43.18,26.67 R39.2 43.18,27.94 43.81,28.57 D20.A | 28.57,25.4 34.29,25.4 | 34.29,25.4 34.71,25.4 | R33.2 35.14,25.4 34.29,25.4 | 26.67,25.4 D17.C
  Bottom 0.406: X3.A1 18.41,25.4 19.05,26.04 26.04,26.04 26.67,25.4 28.75,25.4 T9.2
N$60  (via drill 0.25)
  Top 0.254: IC1.39 72.81,24.34 v72.39,24.77 | v73.66,10.16 74.3,9.53 80.64,9.53 81.28,8.89 81.28,7.62 80.64,6.99 77.47,6.99 JP5.2
  Bottom 0.254: v73.66,10.16 72.39,11.43 v72.39,24.77
N$61  (via drill 0.25 pad 0.25)
  Top 0.254: IC1.6 67.1,24.34 62.87,28.57 v62.23,28.57
  Bottom 0.254: 57.66,27.83 59.17,26.14 | 59.17,26.14 C10.1 | 57.66,27.83 R37.1 | 57.66,27.83 56.94,28.57 53.34,28.57 52.7,27.94 52.7,27.3 48.73,27.3 D20.C | v62.23,28.57 59.69,26.04 59.17,26.14
N$62  (via drill 0.25 pad 0.25)
  Top 0.254: IC1.7 66.33,23.84 v64.77,25.4
  Bottom 0.254: R40.1 v64.77,25.4
N$63  (via drill 0.25 pad 0.25)
  Top 0.254: v53.98,25.4 60.33,25.4 v60.96,25.82
  Bottom 0.254: D19.A 49.4,26.36 T10.1 51.6,25.86 52.07,25.4 v53.98,25.4 | v60.96,25.82 R40.2
N$64
  Top 0.61: LED10.A 50.58,27.3 R39.1
  Bottom 0.61: R39.1 T10.3
N$65  (via drill 0.25 pad 0.25)
  Top 0.254: LED10.C 48.48,25.82 48.26,25.82 48.26,26.67 v47.62,26.67
  Bottom 0.254: v47.62,26.67 47.2,26.67 R38.2
N$66
  Top 0.61: X2.A3 R43.2
  Bottom 0.254: D22.A 21.59,31.11 R43.2 20.32,29.21 20.95,28.57 R42.1 | D19.C 49.53,29.21 58,29.21 R37.2
  Bottom 0.406: X2.A3 15.88,29.84 19.05,26.67 39.37,26.67 42.55,29.84 48.9,29.84 49.53,29.21 51.6,29.21 T10.2
N$67  (via drill 0.25)
  Top 0.254: JP6.2 80.01,5.71 81.92,7.62 81.92,8.89 80.64,10.16 74.93,10.16 v73.66,11.43 | v73.03,25.4 73.58,24.84 IC1.40
  Bottom 0.254: v73.66,11.43 73.03,12.06 v73.03,25.4
N$68  (via drill 0.25 pad 0.25)
  Top 0.254: v52.07,30.48 62.23,30.48 67.37,25.34 IC1.4
  Bottom 0.254: D22.C 24.95,30.93 26.04,29.84 29.84,29.84 29.84,30.48 30.48,31.11 34.08,31.11 R41.1 35.77,29 36.2,28.57 36.2,28.79 | 36.2,28.79 C11.1 | v52.07,30.48 51.44,31.11 37.47,31.11 37.47,29.21 36.2,29.21 36.2,28.79
N$69  (via drill 0.25 pad 0.25)
  Top 0.254: v41.27,29.84 62.23,29.84 67.23,24.84 IC1.5
  Bottom 0.254: R44.1 v41.27,29.84
N$70  (via drill 0.25 pad 0.25)
  Top 0.254: v31.11,27.94 31.75,27.3 37.25,27.3 v37.88,27.94
  Bottom 0.254: D21.A 26.67,28.89 T11.1 28.75,27.94 v31.11,27.94 | R44.2 38.52,28.57 v37.88,27.94
N$71
  Top 0.61: LED11.A 27.72,29.84 R43.1
  Bottom 0.61: R43.1 T11.3
N$72  (via drill 0.25 pad 0.25)
  Top 0.254: v24.77,28.57 25.62,28.57 LED11.C
  Bottom 0.254: v24.77,28.57 R42.2
N$74  (via drill 0.25)
  Top 0.254: IC1.43 77.17,26.34 79.38,24.13 81.92,24.13 84.45,21.59 89.53,21.59 v90.81,20.32
  Bottom 0.254: v90.81,20.32 IC2.11 90.81,16.93 R49.1
N$75  (via drill 0.25)
  Top 0.254: IC1.2 67.64,26.34 64.77,29.21 64.77,30.48 62.23,33.02 v60.53,33.02
  Bottom 0.254: D24.C 48.44,34.11 48.9,33.66 52.7,33.66 52.7,34.29 53.34,34.92 R45.1 C12.1 59.05,32.8 59.05,33.02 v60.53,33.02
N$76  (via drill 0.25 pad 0.25)
  Top 0.254: IC1.3 67.5,25.84 63.5,29.84 v63.5,30.48
  Bottom 0.254: R48.1 63.08,30.9 v63.5,30.48
N$77  (via drill 0.25, 0.25 pad 0.25)
  Top 0.254: v53.98,31.75 v60.33,31.75
  Bottom 0.254: 51.44,32.7 49.4,32.7 D23.A | 51.44,32.7 T12.1 | v53.98,31.75 52.07,31.75 51.44,32.7 | v60.33,31.75 R48.2
N$78
  Top 0.254: LED12.A 50.8,31.34
  Top 0.61: 50.8,31.34 50.8,33.66 R47.1
  Bottom 0.61: R47.1 T12.3
N$79  (via drill 0.25 pad 0.25)
  Top 0.254: v48.26,32.38 48.26,31.75 48.9,31.11 LED12.C
  Bottom 0.254: R46.2 v48.26,32.38
N$80
  Bottom 0.61: L1.2 43.18,36.83 41.27,34.92 X2.A1
N$81  (via drill 0.25)
  Top 0.254: v75.04,28.34 75.97,27.41 IC1.44
  Bottom 0.254: IC2.12 89.53,19.68 88.27,20.95 78.74,20.95 78.74,25.27 76.2,27.94 75.8,28.34 v75.04,28.34
N$82  (via drill 0.25)
  Top 0.254: IC1.42 77.03,25.84 77.47,25.4 v77.47,24.77
  Bottom 0.254: IC2.13 88.27,19.68 87.63,20.32 77.47,20.32 v77.47,24.77
N$83  (via drill 0.25)
  Top 0.254: v74.3,26.04 74.3,25.4 74.3,25.34 IC1.41
  Bottom 0.254: IC2.14 87,19.68 74.93,19.68 74.3,20.32 v74.3,26.04
N$84
  Top 0.61: R47.2 17.78,33.66 16.51,32.38 X2.A2
  Bottom 0.254: D24.A 44.27,34.92 R47.2 44.45,32.38 R46.1 | R41.2 35.14,31.75 28.75,31.75 | 26.67,31.75 D21.C
  Bottom 0.406: X2.A2 26.04,32.38 26.67,31.75 28.75,31.75 T11.2
  Bottom 0.61: T11.2 28.57,30.8
N$85  (via drill 0.25)
  Top 0.254: IC1.32 74.18,20.84 v73.66,20.32 | v75.56,10.79 81.28,10.79 81.92,10.16 84.45,10.16 86.36,8.26 86.36,6.35 85.72,5.71 JP2.2
  Bottom 0.254: v73.66,20.32 73.66,12.7 v75.56,10.79
N$86  (via drill 0.25)
  Top 0.254: v93.34,14.61 92.71,15.24 v87,15.24
  Bottom 0.254: IC2.15 85.72,15.88 C18.2 86.36,15.88 v87,15.24 | C19.1 93.34,15.88 IC2.9 v93.34,14.61 92.88,14.61 T13.3 91.44,12.7 90.17,12.7 R53.1
N$87
  Top 0.254: IC1.35 77.36,22.34 78.11,21.59 R59.1
N$88
  Top 0.254: IC1.36 78.53,22.84 R58.1
N$89  (via drill 0.25)
  Top 0.254: v83.19,21.59 83.82,20.95 83.82,13.97 92.08,13.97 v92.71,13.34
  Bottom 0.254: R52.1 92.29,10.87 T13.1 92.39,13.02 v92.71,13.34 | OK2.3 83.12,21.59 v83.19,21.59
N$90  (via drill 0.25)
  Top 0.254: v80.01,29.21 v90.81,29.21
  Bottom 0.254: v80.01,29.21 78.74,30.48 D28.C | v90.81,29.21 IC2.6
N$92
  Bottom 0.254: CON1.7 85.09,33.66 85.09,31.75 85.72,31.11 86.36,31.11 87,30.48 IC2.3
N$93
  Bottom 0.254: CON1.3 90.17,33.66 90.17,31.11 89.53,30.48 IC2.5
N$94  (via drill 0.25)
  Top 0.254: CON1.1 90.17,33.66 v87.63,33.66
  Bottom 0.254: v87.63,33.66 87.63,31.11 88.27,30.48 IC2.4
N$95
  Bottom 0.254: CON1.9 78.74,34.92 D28.A
N$96
  Bottom 0.254: OK2.1 81.28,30.27 R50.2
N$97
  Bottom 0.254: CON1.5 86.36,35.56 85.72,36.2 83.19,36.2 82.55,35.56 82.55,30.48 R50.1
N$98  (via drill 0.25)
  Top 0.254: IC1.1 68.81,27.7 v68.58,27.94
  Bottom 0.254: v68.58,27.94 68.58,29 68.69,29.1 | 68.69,29.1 C21.1 | R51.2 68.89,29.1 68.69,29.1
N$100
  Bottom 0.254: 51.44,34.29 T12.2 | R45.2 59.27,36.83 58.42,36.83 | D27.C 69.02,32.59 | R51.1 71.75,30.7 D25.1
  Bottom 0.406: T12.2 51.18,35.03 L1.1 58.42,36.83 62.23,36.83 66.04,33.02 | D23.C 50.97,34.76 51.44,34.29 | 66.04,33.02 D27.C | D25.1 D26.1 66.04,32.59 66.04,33.02
N$103  (via drill 0.25)
  Top 0.254: v41.91,3.17 v66.04,3.17 | IC1.25 72.58,17.34 66.67,11.43 v66.04,11.43
  Bottom 0.254: R4.1 v41.91,3.17 | v66.04,3.17 v66.04,11.43
VCC  (via drill 0.25)
  Top 0.254: 80.64,22.86 v81.28,23.5 | 80.64,22.86 R58.2 | 80.64,22.86 80.64,21.59 R59.2 R57.2 80.86,19.16 | v83.19,18.41 82.44,19.16 80.86,19.16 | 80.86,19.16 80.54,19.16 C14.2 78.74,18.2 78.74,19.05 77.47,20.32 | IC1.33 77.08,21.34 77.47,20.95 77.47,20.32 | IC1.31 77.45,20.34 77.47,20.32
  Bottom 0.254: 84.45,15.88 IC2.16 84.3,18.41 v83.19,18.41 | 84.45,15.88 C18.1 | 92.08,15.88 IC2.10 | 92.08,15.88 C19.2 | 84.45,13.97 84.45,15.88 | 84.45,13.97 84.45,8.89 JP2.3 JP6.3 JP5.3 JP4.3 JP3.3 | R49.2 89.32,14.61 89.53,14.61 | 89.53,14.61 90.81,14.61 92.08,15.88 | 81.34,22.16 OK2.4 v81.28,23.5 | 84.45,13.97 89.53,13.97 | 89.53,13.97 89.53,14.61 | R53.2 90.17,13.97 89.53,13.97
(copper drawn outside any net)
  shapes: Bottom circle x3, Top circle x3

## Text on the board
Top: Supervisor Rev 0.5 | 1 | TOS | 0 | A0
Bottom: Markus Walser | 2011
tDocu: C12 | C11 | C10 | SPI | C9 | C8 | T2 | C7 | C6 | T1 | C5 | C4 | C3 | C2 | C1